# Altium PCB carte_electronique_didactique_PittetL02_PCB.PcbDoc
Units mm, origin at the board's own origin, x right, y up, seen from the top; angles counter-clockwise.
Board outline 130 x 80 mm, 2 copper layers (Top Layer, Bottom Layer); 62 components, 24 nets, 148 pads, 11 vias.
Unrouted connection lines stored in the file: 1.
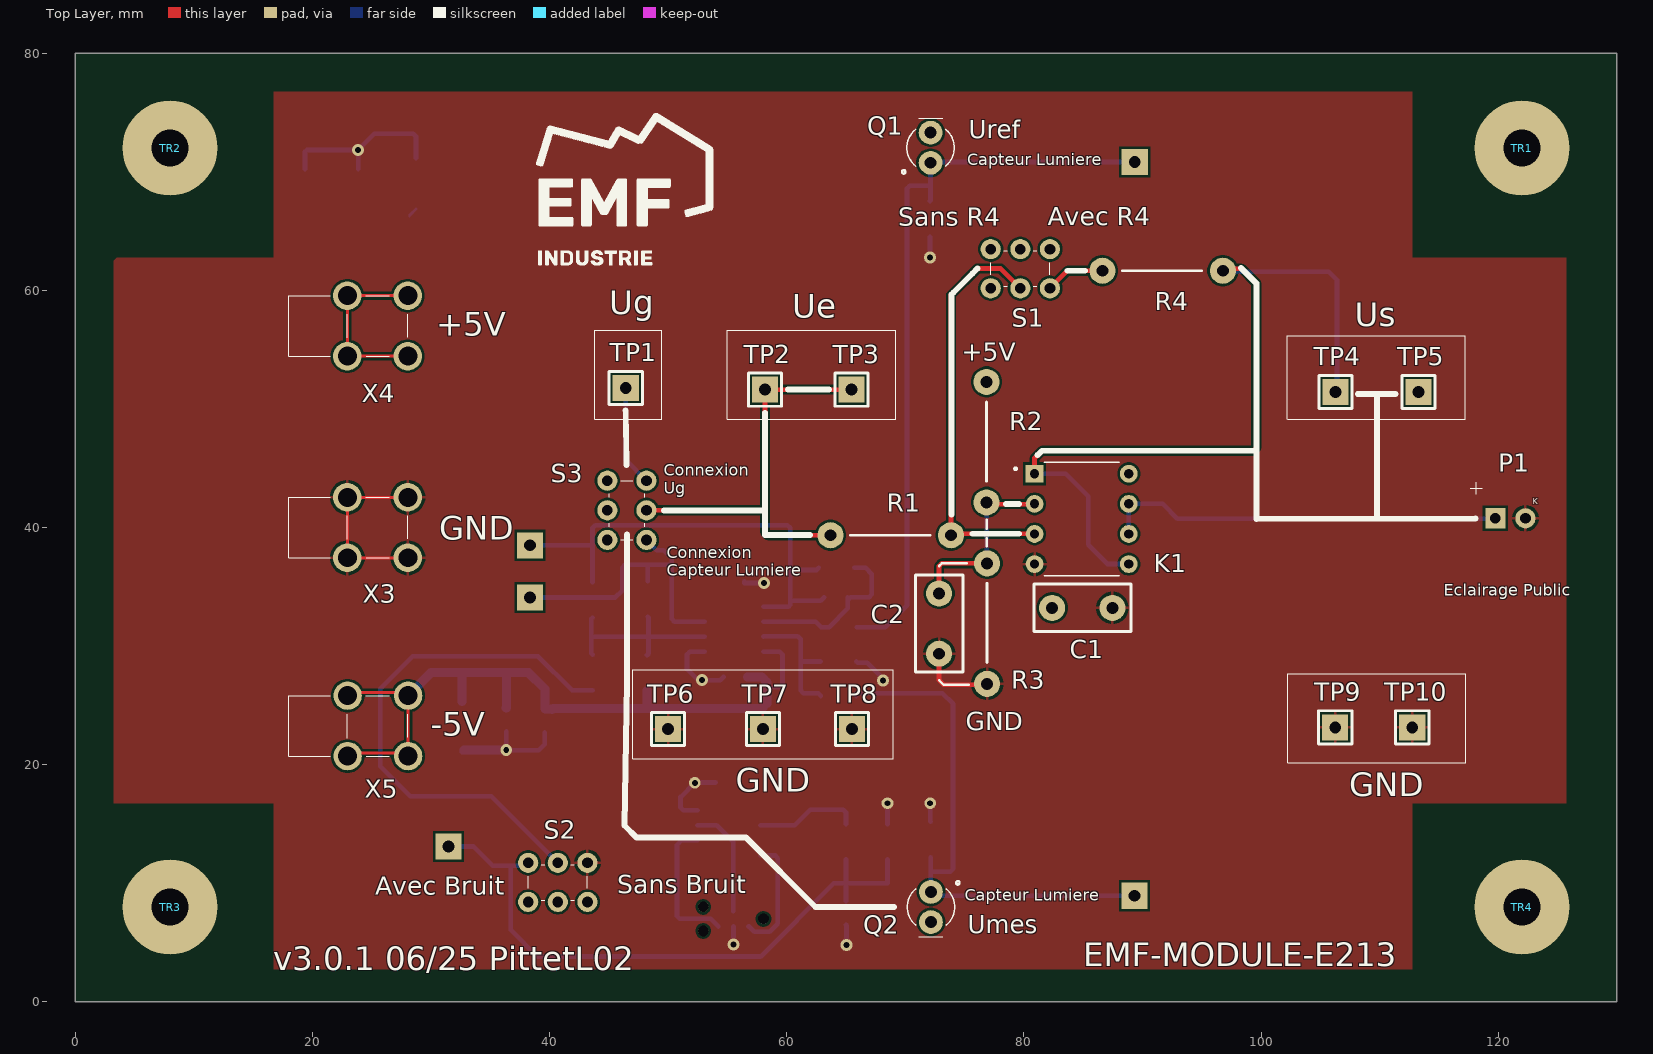
[diagram p0: Top Layer view]
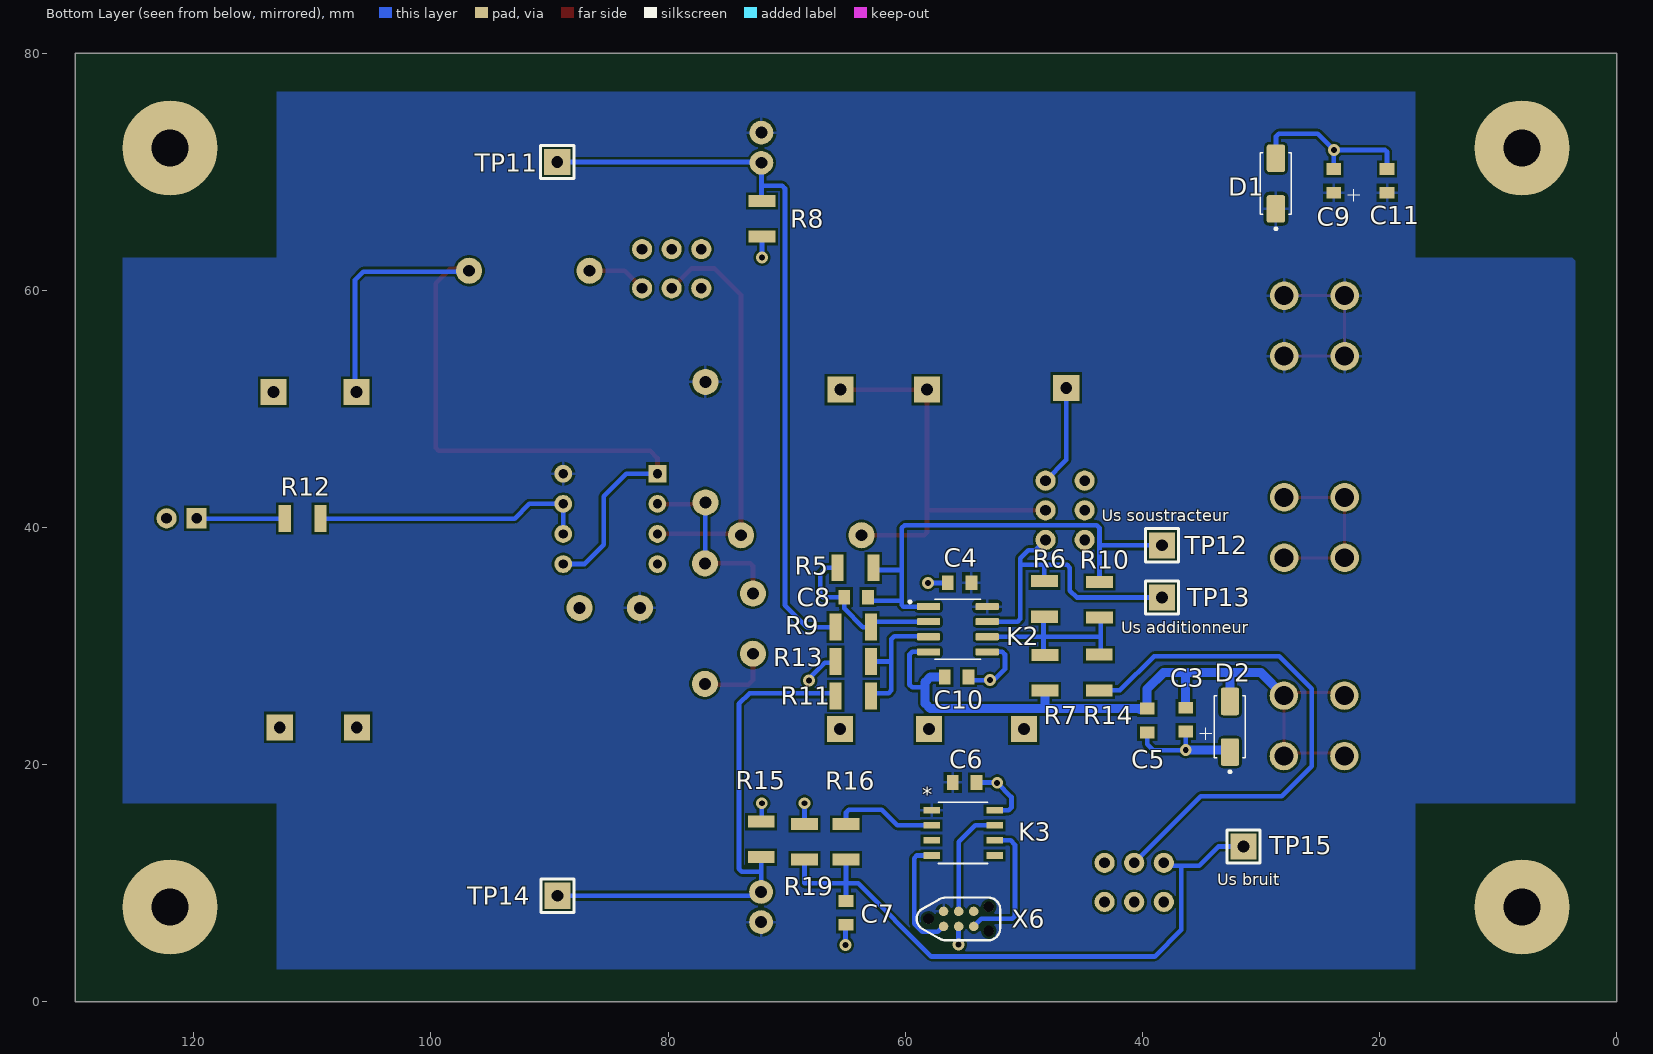
[diagram p1: Bottom Layer view, seen from below]
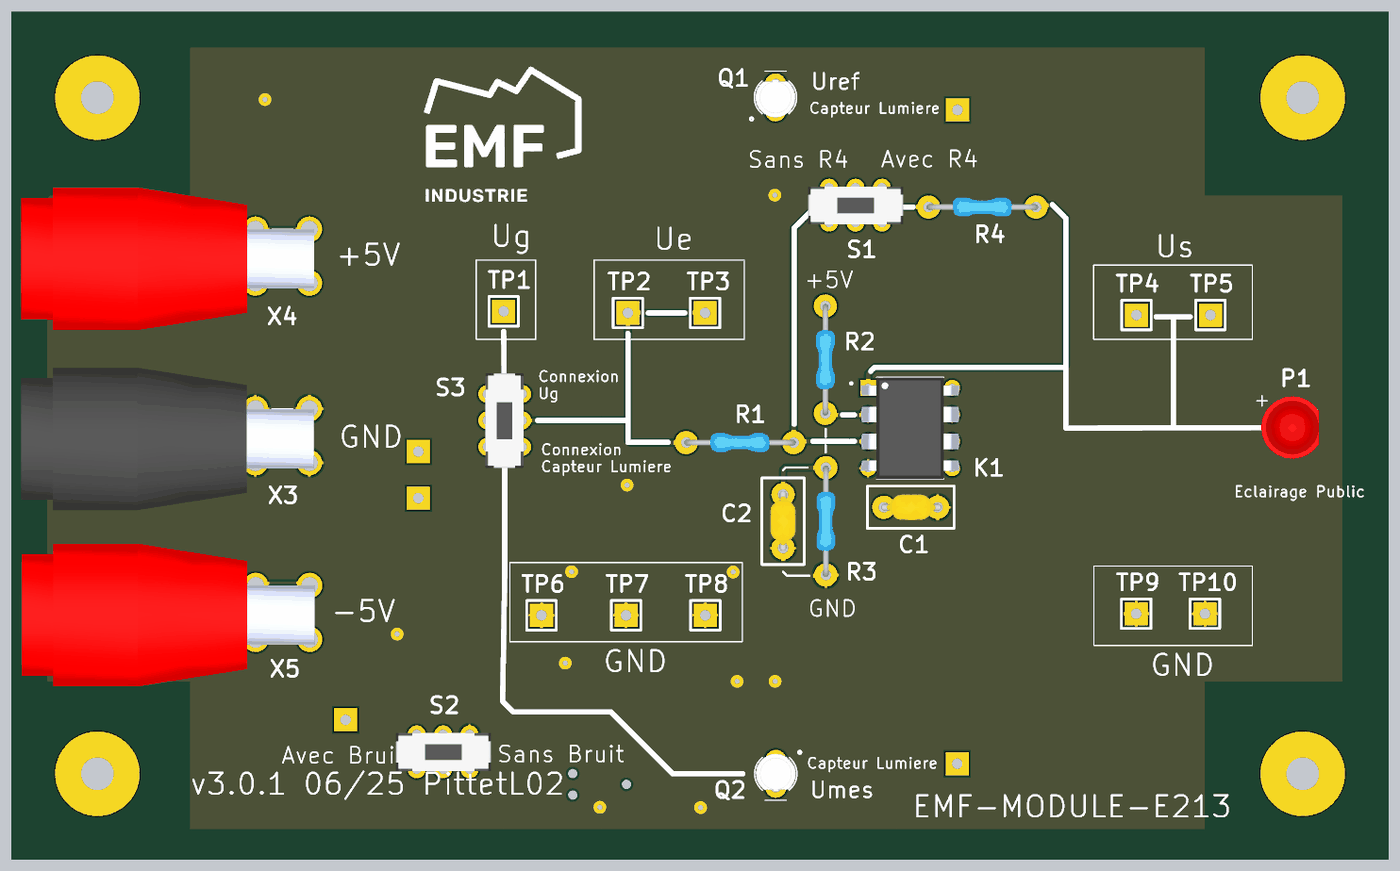
[diagram p2: 3D render of the assembled board from above, using the file's embedded part models]
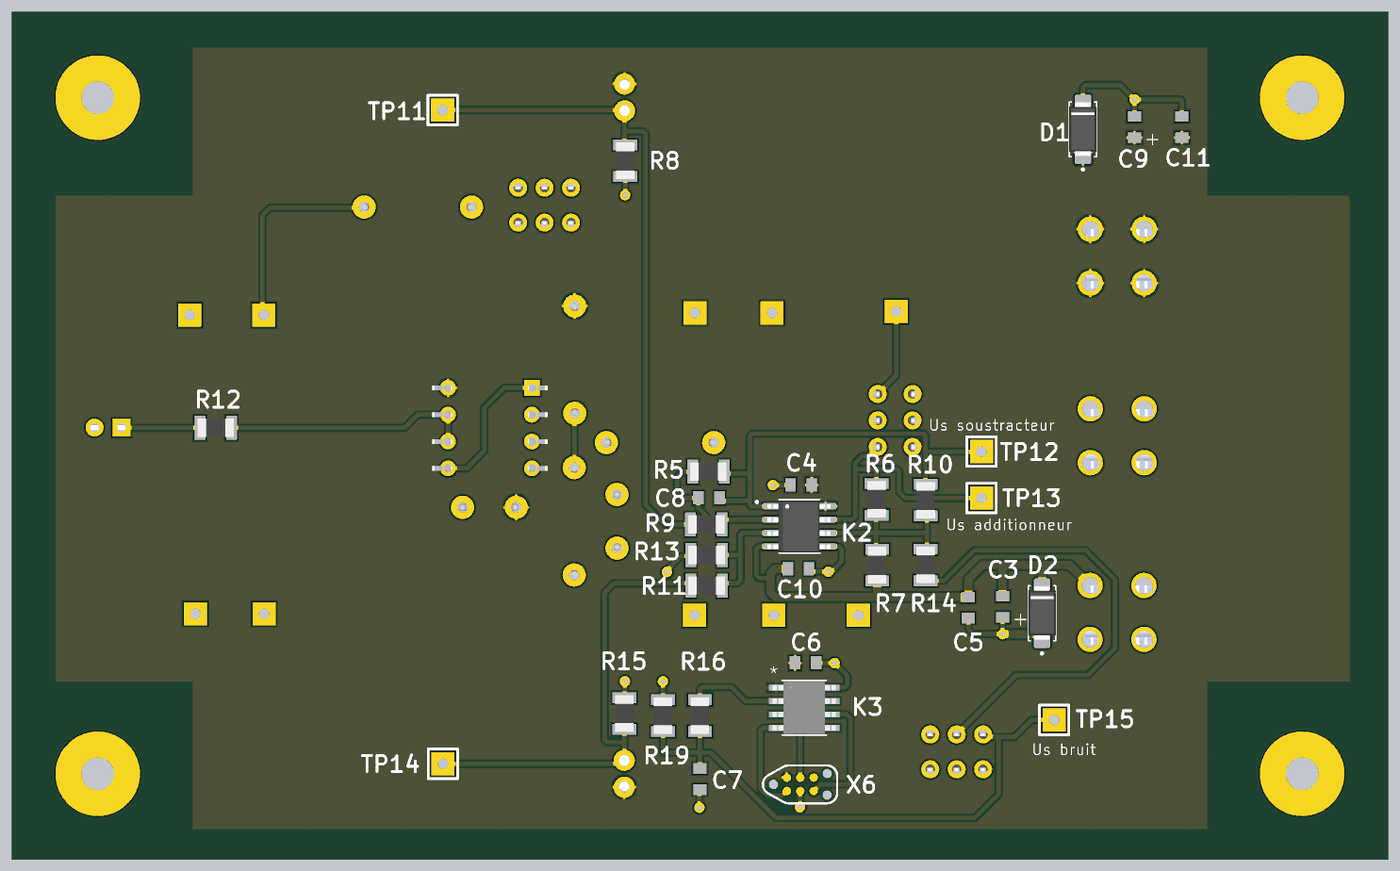
[diagram p3: 3D render of the assembled board from below, using the file's embedded part models]

## Layer stack, top to bottom
Top Solder: solder mask 0.0102, Solder Resist, Dk 3.5
Top Layer: signal copper 0.0356
Dielectric 1: dielectric 0.32, FR-4, Dk 4.8
Bottom Layer: signal copper 0.0356
Bottom Solder: solder mask 0.0102, Solder Resist, Dk 3.5

## Board outline
0,0 0,80 130,80 130,0

## Design rules (kind name [scope] priority, off if disabled: settings)
BoardOutlineClearance [All] p1: gap=0.5 ignorepadtopadclearanceinfootprint=FALSE
Clearance [All] p1: gap=0.2 ignorepadtopadclearanceinfootprint=FALSE
ComponentClearance [All] p1: gap=0.254 collisioncheckmode=3 verticalgap=0.254 showdistances=TRUE checkcomponentboundary=TRUE
HoleSize [All] p1: absolutevalues=TRUE maxlimit=20 minlimit=0.025 maxpercent=80.000 minpercent=20.000
MinimumSolderMaskSliver [All] p1: minsoldermaskwidth=0.23
PolygonConnect PolygonConnect_1 [All] p1: thpad.connectstyle=Relief thpad.reliefconductorwidth=0.254 thpad.reliefentries=4 thpad.polygonreliefangle="90 Angle" thpad.airgapwidth=0.254 smdpad.connectstyle=Relief smdpad.reliefconductorwidth=0.254 smdpad.reliefentries=4 smdpad.polygonreliefangle="90 Angle" smdpad.airgapwidth=0.254 via.connectstyle=Direct via.reliefconductorwidth=0.254 via.reliefentries=4 via.polygonreliefangle="90 Angle" via.airgapwidth=0.254
RoutingVias [All] p1: holewidth=0.711 width=1.27 viastyle="Through Hole" minholewidth=0.711 minwidth=1.27 maxholewidth=0.711 maxwidth=1.27 useviatemplates=TRUE viatemplateguid#1={0FCB3E96-987E-4DAB-BA2D-EE9FF4002D56} viatemplatename#1=v100h50
SilkToSolderMaskClearance [IsPad] p1: minsilkscreentomaskgap=0.17 clearancetoexposedcopper=TRUE
SolderMaskExpansion [All] p1: expansion=0.102 istentingtop=FALSE
Width [All] p1: maxlimit=0.762 minlimit=0.254 preferedwidth=0.4
26 further rules are at their usual default settings.

## Components (designator, comment, footprint, x,y, rotation, side; value= is the part's Value field where it differs from the comment)
C1 "0.1uF" CTHTNP8x4x11e5 84.925,33.225 r0 top
C2 "0.1uF" CTHTNP8x4x11e5 72.85,31.9 r90 top
C3 "10uF" "C_0805 TANTALE" 36.35,23.8 r270 bottom
C4 "100nF" "C_0805 CERAMIQUE" 55.425,35.35 r0 bottom
C5 "100nF" "C_0805 CERAMIQUE" 39.6,23.725 r270 bottom
C6 "100nF" "C_0805 CERAMIQUE" 55,18.5 r0 bottom
C7 "3.3uF" "C_0805 CERAMIQUE" 65,7.5 r90 bottom
C8 "470nF" "C_0805 CERAMIQUE" 64.15,34.127 r180 bottom
C9 "10uF" "C_0805 TANTALE" 23.875,69.225 r270 bottom
C10 "100nF" "C_0805 CERAMIQUE" 55.675,27.4 r180 bottom
C11 "100nF" "C_0805 CERAMIQUE" 19.375,69.225 r90 bottom
D1 "SMAZ5V6-13-F" DIOM5226X240N 28.75,69 r90 bottom
D2 "SMAZ5V6-13-F" DIOM5226X240N 32.625,23.2 r90 bottom
K1 "LMC6482_THT" LMC6482_THT 84.85,40.7 r0 top
K2 "LMC6482_SMD" LMC6482_SMD 55.569,31.424 r180 bottom
K3 "PIC16F15214-I/SN" PIC16F15214-I/SN 55.254,14 r180 bottom
P1 "LED" LED 121.025,40.775 r0 top
Q1 "SFH-3310_EN" SFH-3310_EN 72.15,72.025 r90 top
Q2 "SFH-3310_EN" SFH-3310_EN 72.15,8 r270 top
R1 "33K" RTHT0250W 68.775,39.35 r90 top
R2 "10K" RTHT0250W 76.85,47.2 r0 top
R3 "10K" RTHT0250W 76.9,31.9 r0 top
R4 "2M2" RTHT0250W 91.7,61.65 r90 top
R5 "100k" "RESISTANCES 1206" 64.2,36.6 r180 bottom
R6 "10k" "RESISTANCES 1206" 48.275,33.975 r90 bottom
R7 "22k" "RESISTANCES 1206" 48.225,27.75 r90 bottom
R8 "10k" "RESISTANCES 1206" 72.075,66.025 r90 bottom
R9 "100k" "RESISTANCES 1206" 64.4,31.6 r180 bottom
R10 "10k" "RESISTANCES 1206" 43.625,33.9 r270 bottom
R11 "100k" "RESISTANCES 1206" 64.375,25.8 r180 bottom
R12 "270E" "RESISTANCES 1206" 110.825,40.75 r0 bottom
R13 "100k" "RESISTANCES 1206" 64.375,28.7 r180 bottom
R14 "820k" "RESISTANCES 1206" 43.65,27.775 r90 bottom
R15 "10k" "RESISTANCES 1206" 72.15,13.7 r270 bottom
R16 "33k" "RESISTANCES 1206" 65,13.5 r90 bottom
R19 "16k" "RESISTANCES 1206" 68.5,13.5 r270 bottom
S1 "Switch On-On" "SLIDE SWITCHES" 79.7,61.825 r180 top
S2 "Switch On-On" "SLIDE SWITCHES" 40.7,10.075 r180 top
S3 "Switch On-On" "Slide Switches" 46.525,41.45 r90 top
TP1 "TP rouge" TP10_22 46.425,51.775 r0 top
TP2 "TP rouge" TP10_22 58.175,51.625 r0 top
TP3 "TP rouge" TP10_22 65.474,51.625 r0 top
TP4 "TP bleu" TP10_22 106.275,51.425 r0 top
TP5 "TP bleu" TP10_22 113.275,51.425 r0 top
TP6 "TP noir" TP10_22 50,23 r0 top
TP7 "TP noir" TP10_22 58,23 r0 top
TP8 "TP noir" TP10_22 65.5,23 r0 top
TP9 "TP noir" TP10_22 106.25,23.15 r0 top
TP10 "TP noir" TP10_22 112.75,23.15 r90 top
TP11 "TP rouge" TP10_22 89.35,70.827 r180 bottom
TP12 "TP rouge" TP10_22 38.35,38.5 r90 bottom
TP13 "TP rouge" TP10_22 38.35,34.1 r90 bottom
TP14 "TP rouge" TP10_22 89.322,8.948 r90 bottom
TP15 "TP rouge" TP10_22 31.475,13.1 r90 bottom
TR1 "trou" TROU 122,72 r0 top
TR2 "trou" TROU 8,72 r0 top
TR3 "trou" TROU 8,8 r0 top
TR4 "trou" TROU 122,8 r0 top
X3 "Connecteur Banane GND" CT3151-0 25.5,40 r180 top
X4 "Connecteur Banane VCC" CT3151-2 25.5,57 r180 top
X5 "Connecteur Banane VDD" CT3151-4 25.5,23.25 r180 top
X6 "1x6" CONN_TC2030NL 55.5,7 r180 bottom

## Footprints (in the part's own frame and the unit in brackets; to place one, negate y for a bottom-side part, rotate by r counter-clockwise, add the part's x,y. Pads: shape width x height; smd on the part's side, far side on the other; paste and mask are expansions set on the pad)
"C_0805 CERAMIQUE" [mm] "Condensateur 0805"
  rect 1x1.25 smd: 1(-1,0) 2(1,0)
  body extent -1.3,-0.63 1.3,0.63, height 0.78
"C_0805 TANTALE" [mm] "Condensateur 0805"
  rect 1x1.25 smd: 1(-1,0) 2(1,0)
  silkscreen extent 0.7,1.2 1.7,2.2, body extent -1.3,-0.63 1.3,0.63, height 0.78
CONN_TC2030NL [mm] "P1085"
  round 0.8 smd paste-0.4: 1(-1.27,-0.635) 2(-1.27,0.635) 3(0,-0.635) 4(0,0.635) 5(1.27,-0.635) 6(1.27,0.635)
  round 0.85 hole 0.9 unplated mask+0: ""(-2.54,0) ""(2.54,-1.016) ""(2.54,1.016)
  silkscreen extent -3.54,-1.8 3.5,1.8
CT3151-0 [mm] "Connecteur banane GND"
  round 2.4 hole 1.6: GND(-2.55,2.55) GND(-2.55,-2.55) GND(2.55,2.55) GND(2.55,-2.55)
  silkscreen extent -2.55,-2.55 7.5,2.55, body extent -2.98,-6.45 24.73,7.05, height 19.25
CT3151-2 [mm]
  round 2.4 hole 1.6: VCC(-2.55,2.55) VCC(-2.55,-2.55) VCC(2.55,2.55) VCC(2.55,-2.55)
  silkscreen extent -2.55,-2.55 7.5,2.55, body extent -3,-6.5 24.7,7, height 19.25
CT3151-4 [mm] "Connecteur banane VDD"
  round 2.4 hole 1.6: VDD(-2.575,2.525) VDD(-2.575,-2.575) VDD(2.525,2.525) VDD(2.525,-2.575)
  silkscreen extent -2.55,-2.55 7.5,2.55, body extent -3.03,-6.53 24.68,6.97, height 19.25
CTHTNP8x4x11e5 [mm] "P27"
  round 2.2 hole 1: 1(-2.54,0) 2(2.54,0)
  silkscreen extent -4.09,-2 4.1,2, body extent -2.78,-1.22 2.88,1.23, height 5.4
DIOM5226X240N [mm]
  rrect25% 2.33x1.55 smd: 1(-2.135,0) 2(2.135,0)
  silkscreen extent -3.9,-1.3 2.6,1.3, body extent -2.57,-1.3 2.62,1.3, height 2.4
LED [mm] "THT"
  rect 1.7x1.7 hole 0.9: 1(-1.27,0)
  round 1.7 hole 0.9: 2(1.27,0)
  body extent -2.95,-2.95 2.5,2.95, height 9.6
LMC6482_SMD [mm]
  rrect25% 1.97x0.6 smd: 1(-2.47,1.905) 2(-2.47,0.635) 3(-2.47,-0.635) 4(-2.47,-1.905) 5(2.47,-1.905) 6(2.47,-0.635) 7(2.47,0.635) 8(2.47,1.905)
  silkscreen extent -4.14,-2.52 1.95,2.52, body extent -3.05,-2.48 2.95,2.42, height 1.75
LMC6482_THT [mm]
  rect 1.5x1.5 hole 0.78: 1(-3.945,3.835)
  round 1.5 hole 0.78: 2(-3.945,1.295) 3(-3.945,-1.245) 4(-3.945,-3.785) 5(3.995,-3.785) 6(3.995,-1.245) 7(3.995,1.295) 8(3.995,3.835)
  silkscreen extent -5.65,-4.77 3.2,4.82, body extent -5.44,-4.77 5.49,4.82, height 5.08
PIC16F15214-I/SN [mil]
  rect 55x22 smd paste+0 mask+0: 1(-99.5,85) 2(-99.5,35) 3(-99.5,-15) 4(-99.5,-65) 5(109.5,-65) 6(109.5,-15) 7(109.5,35) 8(109.5,85)
  silkscreen extent -77,-92 87,112, body extent -113,-86 123,106, height 69
"RESISTANCES 1206" [mil] "Chip Resistor, 1206"
  rect 40x89 smd: 1(-59.06,0) 2(59.06,0)
  body extent -68,-34 68,34, height 28
RTHT0250W [mm] "P5"
  round 2.2 / inner round 1.524 / far side round 2.2 hole 1.001: 1(0,5.08) 2(0,-5.08)
  silkscreen extent 0,-3.3 0,3.4, body extent -0.9,-5.27 0.9,5.27, height 1.8
SFH-3310_EN [mm] "Photo-transistor NPN"
  round 2 hole 1: 1(-1.27,0.016) 2(1.27,0.016)
  silkscreen extent -2.18,-1.98 2.5,2.42, body extent -1.9,-1.88 1.65,1.91, height 2.8
"SLIDE SWITCHES" [mm] "Sub-Miniature Slide Switches"
  round 1.7 hole 0.9: 1(-2.5,-1.65) 2(0,-1.65) 3(2.5,-1.65) 4(-2.5,1.65) 5(0,1.65) 6(2.5,1.65)
  silkscreen extent -2.5,-1.5 2.5,1.5, body extent -4.53,-1.77 4.47,1.83, height 5.5
"Slide Switches" [mm] "Sub-Miniature Slide Switches"
  round 1.7 hole 0.9: 1(-2.5,-1.65) 2(0,-1.65) 3(2.5,-1.65) 4(-2.5,1.65) 5(0,1.65) 6(2.5,1.65)
  silkscreen extent -2.5,-1.5 2.5,1.5, body extent -4.53,-1.77 4.47,1.83, height 5.5
TP10_22 [mm] "P438"
  rect 2.2x2.2 hole 1: 1(0,0)
  silkscreen extent -1.4,-1.4 1.4,1.4
TROU [mm]
  round 8 hole 3.1 unplated: 1(0,0)

## Part data
C1 C2: library part CCER_THT-11, "C CER X7R 0,1uF/50V 20% DEC (E=5)", Manufacturer Part Number 1=K104M15X7RF5UH5, Volt=50V, EMF_PN=CCER_THT-11, Type=CX7R
C3 C9: library part "CONDO 1uF Tantale", "0805"
C4 C5 C6 C7 C8 C10 C11: library part "CONDO 100nf", "0805"
D1 D2: "Diode zener", Package=None, Availability=Unavailable, MF="{'manufacturer': u'Diodes Incorporated'}", MP=SMAZ5V6-13-F, Price=None
Q1 Q2: "Photo-transistor"
R1: library part RMETAL0250W-32, "R METAL 33K  1%  1/2W", Power=0.5W, EMF_PN=RMETAL0250W-32, Stab(ppm)=100, Tol=0.01, Type=RSTD025
R2 R3: library part RMETAL0250W-26, "R METAL 10K  1%  1/2W", Power=0.5W, EMF_PN=RMETAL0250W-26, Stab(ppm)=100, Tol=0.01, Type=RSTD025
R4: library part RMETAL0250W-52, "R METAL 2M2  1% 1/2W", Power=0.5W, EMF_PN=RMETAL0250W-52, Stab(ppm)=100, Tol=0.01, Type=RSTD025
R5 R6 R7 R8 R9 R10 R11 R12 R13 R14 R15 R16 R19: library part "Resistances smd 1206", "Resistance 1206", Manufacturer=Panasonic, Manufacturer Part Number 1=ERA-6AEB472V, Part Number=ERA6AEB472V, Manufacturer 1=Panasonic
S1 S2 S3: "Switch on-on de côté"
TP1 TP2 TP3 TP11 TP12 TP13 TP14 TP15: library part TP-04, "Point de test CI isolé rouge", Manufacturer 1="Keystone Electronics", Manufacturer Part Number 1=5000, EMF_PN=TP-04, Type=TP
TP4 TP5: library part TP-02, "Point de test CI isolé bleu", Manufacturer 1="Keystone Electronics", Manufacturer Part Number 1=5117, EMF_PN=TP-02, Type=TP
TP6 TP7 TP8 TP9 TP10: library part TP-03, "Point de test CI isolé noir", Manufacturer 1="Keystone Electronics", Manufacturer Part Number 1=5001, EMF_PN=TP-03, Type=TP
X6: library part CONN_TC2030, "Conn. avec plage pour contact à ressort TAG-Connect TC2030-IDC-NL", Manufacturer 1=TAG-CONNECT, Manufacturer Part Number 1=TC2030-IDC-NL, EMF_PN=CONN_TC2030, Famille=TAG-CONNECT, Nb pins=6, Pas (mm)=1.27, Type=Smd\TAG

## Via types
v1: diameter 1, hole 0.5, Top Layer to Bottom Layer, 11 vias

## Nets (pads, with @x,y where several pads share a name; then routed paths per layer and width w, separated by ;. In a path a pad name is that pad's centre, name@x,y a point inside that pad or via, vN(x,y) a via of type N, cw(c..) or ccw(c..) an arc to the next point about the centre after c; other vN are vias at no path point)
+5V: C1.1 C4.1 C6.2 C9.2 C11.1 D1.1 K1.8 K2.8 K3.1 Q1.2 Q2.2 R2.1 X4.VCC X6.2 | length 17
  Top Layer w0.254: X4.VCC@28.05,59.55 22.95,59.55 22.95,54.45 28.05,54.45 X4.VCC@28.178,54.322
  Bottom Layer w0.254: X4.VCC@28.05,59.55 X4.VCC@28.173,59.673 ; D1.1@28.173,66.288 D1.1
  Bottom Layer w0.4: X4.VCC@28.05,59.55 X4.VCC@28.05,60.084
-5V: C3.1 C5.1 C10.1 D2.2 K2.4 R7.1 X5.VDD | length 65.2
  Top Layer w0.254: X5.VDD@22.975,20.975 28.075,20.975 28.075,25.825 28.075,26.075 22.975,26.075 X5.VDD@22.975,25.825
  Bottom Layer w0.4: K2.4 59.416,29.519 59.65,29.285 59.65,26.759 59.416,26.525 58.325,26.525
  Bottom Layer w0.762: X5.VDD@28.075,25.825 30.025,27.775 32.625,27.775 ; D2.2 32.625,27.775 ; C3.1 36.375,24.825 36.375,27.775 ; 48.225,24.85 R7.1 ; C10.1 57.879,27.4 58.325,26.954 58.325,26.525 58.325,25.171 57.879,24.725 40.29,24.725 40.209,24.644 40.172,24.681 39.644,24.681 C5.1 39.6,26.4 38.225,27.775 36.375,27.775 ; 32.625,27.775 36.375,27.775
GND: C1.2 C2.1 C3.2 C4.2 C5.2 C6.1 C7.1 C9.1 C10.2 C11.2 D1.2 D2.1 K1.4 K2.5 K3.8 P1.2 R3.2 R8.1 R13.1 R15.1 R19.1 S2.1 TP6.1 TP7.1 TP8.1 TP9.1 TP10.1 X3.GND X6.3 | length 72.4
  Top Layer w0.254: X3.GND@28.05,37.7 27.8,37.45 23.2,37.45 22.95,37.7 22.95,42.8 23.2,42.55 27.8,42.55 X3.GND@28.05,42.8
  Top Layer w0.4: C2.1 72.85,27.125 73.23,26.745 76.825,26.745 R3.2
  Bottom Layer w0.4: C11.2 19.375,71.676 19.524,71.825 v1(23.85,71.825) ; C9.1 23.875,71.8 v1(23.85,71.825) ; D1.2 28.75,72.966 28.516,73.2 25.225,73.2 v1(23.85,71.825) ; D2.1 D2.1@32.785,21.225 ; C3.2 v1(36.35,21.225) 39.1,21.225 39.6,21.725 C5.2 ; K3.8 52.468,16.155 51.284,16.155 51.05,16.389 51.05,17.275 v1(52.25,18.475) 52.275,18.5 C6.1 ; K2.5 53.096,29.522 51.834,29.522 51.599,29.288 51.599,28.051 52.405,27.245 52.735,27.245 v1(52.85,27.13) 54.405,27.13 C10.2 ; X6.3 55.513,6.353 55.513,4.837 v1(55.525,4.825) ; C4.2@56.425,35.475 C4.2 56.45,35.325 v1(58.1,35.325) ; C7.1 65.05,6.45 v1(65.05,4.8) ; R13.1 65.975,28.6 66.788,28.6 68.131,27.257 v1(68.131,27.1) ; R19.1 v1(68.5,16.75) ; v1(72.075,62.775) R8.1 ; v1(72.1,16.75) 72.1,15.25 R15.1
  Bottom Layer w0.762: D2.1@32.785,21.225 v1(36.35,21.225)
NetC2_2: C2.2 K1.2 R2.2 R3.1 | length 15.7
  Top Layer w0.4: C2.2 72.85,36.746 73.084,36.98 R3.1 ; R2.2 77,41.97 K1.2@80.88,41.97
  Bottom Layer w0.4: R2.2 76.875,42.095 R3.1@76.875,37.005
NetC7_2: C7.2 R16.1 R19.2 S2.3 TP15.1 | length 53.7
  Bottom Layer w0.4: TP15.1 33.6,13.1 35.224,11.476 36.734,11.476 ; S2.3 37.951,11.476 37.417,11.476 36.734,11.476 ; C7.2 65,10 ; R16.1 65,10 ; R19.2 68.5,10 65,10 ; 36.734,11.476 36.734,6.066 38.975,3.825 55.25,3.825 57.8,3.825 63.975,10 65,10
NetC8_1: C8.1 K2.2 R5.1 R9.2 | length 14.4
  Bottom Layer w0.4: K2.2 62.441,32.059 R9.2 63.575,31.6 65.15,33.175 C8.1 ; C8.1@65.288,33.988 65.427,34.127 66.941,34.127 67.175,34.361 67.175,36.08 66.655,36.6 R5.1
NetC8_2: C8.2 K2.1 R5.2 R10.1 TP12.1 | length 41
  Bottom Layer w0.4: TP12.1 43.625,38.5 ; R10.1 43.625,38.5 ; K2.1 60.154,33.329 60.3,33.475 60.3,33.829 ; R5.2 62.525,36.425 60.3,36.425 ; C8.2 62.852,33.829 60.3,33.829 ; 43.625,38.5 43.625,39.966 43.859,40.2 60.066,40.2 60.3,39.966 60.3,36.425 ; 60.3,33.829 60.3,36.425
NetK1_1: K1.1 K1.5 R4.2 TP4.1 TP5.1 | length 70.6
  Top Layer w0.4: K1.1 80.905,45.855 81.525,46.475 99.366,46.475 99.6,46.709 99.6,60.6 98.371,61.829 96.959,61.829 R4.2
  Bottom Layer w0.4: K1.1 83.515,44.535 85.425,42.625 85.425,38.55 87.06,36.915 K1.5 ; R4.2 96.855,61.575 105.7,61.575 106.4,60.875 106.4,51.55 TP4.1
NetK1_3: K1.3 R1.2 S1.5 | length 34.8
  Top Layer w0.4: S1.5 78.025,61.85 76.095,61.85 73.855,59.61 R1.2 73.98,39.475 80.885,39.475 K1.3
NetK1_6: K1.6 K1.7 R12.1 | length 23.5
  Bottom Layer w0.4: K1.6 88.845,40.725 ; 88.85,40.725 88.845,40.73 K1.7 91.705,41.995 92.95,40.75 R12.1
NetK2_3: K2.3 R11.2 R13.2 | length 11.2
  Bottom Layer w0.4: K2.3 58.075,30.825 60.941,30.825 61.175,30.591 61.175,28.7 ; R11.2 62.65,26.025 61.409,26.025 61.175,26.259 61.175,28.7 ; R13.2 61.175,28.7
NetK2_6: K2.6 R6.1 R7.2 R10.2 R14.2 | length 16.1
  Bottom Layer w0.4: R10.2 43.525,32.3 43.525,30.789 ; R14.2 43.525,29.4 43.525,30.789 ; R7.2 48.35,29.375 48.35,30.789 ; R6.1 48.35,32.4 48.35,30.789 ; K2.6 48.35,30.789 ; 43.525,30.789 48.35,30.789
NetK2_7: K2.7 R6.2 S3.1 TP13.1 | length 26.4
  Bottom Layer w0.4: TP13.1 45.55,34.1 46.125,34.675 46.125,36.616 46.359,36.85 48.345,36.85 ; S3.1 49.046,38.079 49.637,38.079 50.3,37.416 50.3,36.85 ; R6.2 48.275,36.78 48.345,36.85 ; K2.7 50.534,32.059 50.3,32.293 50.3,36.85 ; 48.345,36.85 50.3,36.85
NetK3_2: K3.2 R16.2 | length 8.8
  Bottom Layer w0.4: K3.2 60.673,14.889 61.984,16.2 64.766,16.2 65,15.966 R16.2
NetK3_4: K3.4 X6.1 | length 10
  Bottom Layer w0.4: X6.1 56.814,6.365 57.254,5.925 58.576,5.925 59.25,6.599 59.25,12.115 59.016,12.349 K3.4
NetK3_6: K3.6 X6.5 | length 11.7
  Bottom Layer w0.4: K3.6 51.119,13.619 50.75,13.25 50.75,7.234 50.984,7 53.595,7 X6.5
NetK3_7: K3.7 X6.4 | length 9.5
  Bottom Layer w0.4: K3.7 54.111,14.889 55.5,13.5 X6.4
NetP1_1: P1.1 R12.2 | length 7.4
  Bottom Layer w0.4: R12.2 P1.1@119.73,40.75
NetQ1_1: Q1.1 R8.2 R9.1 TP11.1 | length 62.7
  Bottom Layer w0.4: R9.1 68.3,31.6 70.15,33.45 70.15,68.581 70.384,68.815 72.134,68.815 Q1.1 72.207,70.827 TP11.1 ; R8.2 72.134,67.584 72.134,68.775
NetQ2_1: Q2.1 R11.1 R15.2 TP14.1 | length 45.1
  Bottom Layer w0.4: R11.1 65.875,26.025 73.136,26.025 74.03,25.131 74.03,11.225 73.782,10.977 72.15,10.977 ; Q2.1@72.15,8.936 72.15,10.977 ; R15.2 72.15,10.977 ; Q2.1@72.166,8.92 72.193,8.948 TP14.1 TP14.1@89.35,8.975
NetR1_1: R1.1 S3.2 TP2.1 TP3.1 | length 35
  Top Layer w0.4: S3.2 58.175,41.45 ; R1.1 58.409,39.35 58.175,39.584 58.175,41.45 ; TP3.1 TP2.1 58.175,41.45
NetR4_1: R4.1 S1.4 | length 5
  Top Layer w0.4: S1.4 83.675,61.65 R4.1
NetR14_1: R14.1 S2.2 | length 45.1
  Bottom Layer w0.4: S2.2 35.075,17.35 28.25,17.35 25.725,19.875 25.725,26.4 28.475,29.15 39.025,29.15 41.9,26.275 R14.1
NetS3_3: S3.3 TP1.1 | length 8.5
  Bottom Layer w0.4: TP1.1 46.425,45.7 S3.3
pads on no net: K3.3 K3.5 S1.1 S1.2 S1.3 S1.6 S2.4 S2.5 S2.6 S3.4 S3.5 S3.6 TR1.1 TR2.1 TR3.1 TR4.1 X6. X6.6

## Polygon pours and split planes (outlines as drawn)
+5V on Bottom Layer "Top Layer-No Net 1" (solid, remove dead copper, pour order 12): 17,76.75 17,62.75 3.75,62.75 3.5,62.5 3.5,16.75 17,16.75 17,2.75 113,2.75 113,16.75 126,16.75 126,62.75 113,62.75 113,76.75
GND on Top Layer "Top Layer-No Net 1" (solid, remove dead copper, pour order 7): 16.75,76.75 16.75,62.75 3.5,62.75 3.25,62.5 3.25,16.75 16.75,16.75 16.75,2.75 112.75,2.75 112.75,16.75 125.75,16.75 125.75,62.75 112.75,62.75 112.75,76.75

## Silkscreen, mask and mechanical layers (free items; w line width, h text height)
Top Overlay:
  drawing of 80 lines, arcs and shapes, not listed
  text "Uref" at 75.35,72.825 h1.5
  text "Capteur Lumiere" at 75.225,70.533 h1
  text "Avec R4" at 82,65.475 h1.52
  text "Sans R4" at 69.4,65.425 h1.52
  text "Ug" at 45.05,57.967 h2
  text "Ue" at 60.45,57.675 h2
  text "Us" at 107.9,56.975 h2
  text "+5V" at 30.45,56.175 h2
  text "+5V" at 74.775,54.05 h1.52
  text "Connexion  / Ug" at 49.637,42.85 h1
  text "GND" at 30.7,38.95 h2
  text "Connexion  / Capteur Lumiere" at 49.9,35.925 h1
  text "Eclairage Public" at 115.4,34.233 h1
  text "GND" at 75.1,22.925 h1.52
  text "-5V" at 29.975,22.45 h2
  text "GND" at 55.7,17.7 h2
  text "GND" at 107.45,17.35 h2
  text "Sans Bruit" at 45.7,9.15 h1.52
  text "Avec Bruit" at 25.3,9.025 h1.52
  text "Capteur Lumiere" at 75,8.533 h1
  text "Umes" at 75.25,5.775 h1.5
  text "EMF-MODULE-E213" at 85,3 h2
  text "v3.0.1 06/25 PittetL02" at 16.7,2.675 h2
Bottom Overlay:
  text "Us soustracteur" at 43.425,40.525 h1
  text "Us additionneur" at 41.8,31.1 h1
  text "Us bruit" at 33.675,9.825 h1
Outline:
  the board outline again, w0.3
Route Tool Path:
  lines w2: -1,0 ccw(c0,0) 0,-1 ; -1,0 ccw(c0,0) 0,-1 ; -1,0 -1,80 ; -1,80 cw(c0,80) 0,81 ; -1,80 cw(c0,80) 0,81 ; 0,-1 130,-1 ; 0,81 130,81 ; 130,-1 ccw(c130,0) 131,0 ; 130,-1 ccw(c130,0) 131,0 ; 130,81 cw(c130,80) 131,80 ; 130,81 cw(c130,80) 131,80 ; 131,0 131,80

## Text inside footprints (layer, text, board x,y; h text height)
K3: Bottom Overlay "*" at 58.554,16.85 h1.27
P1: Top Overlay "K" at 122.925,41.975 h0.5